# Altium PCB PCB.PcbDoc
Units mil, origin at the board's own origin, x right, y up, seen from the top; angles counter-clockwise.
Board outline 1578.8 x 1417.32 mil, 2 copper layers (Top Layer, Bottom Layer); 30 components, 50 nets, 209 pads, 57 vias.
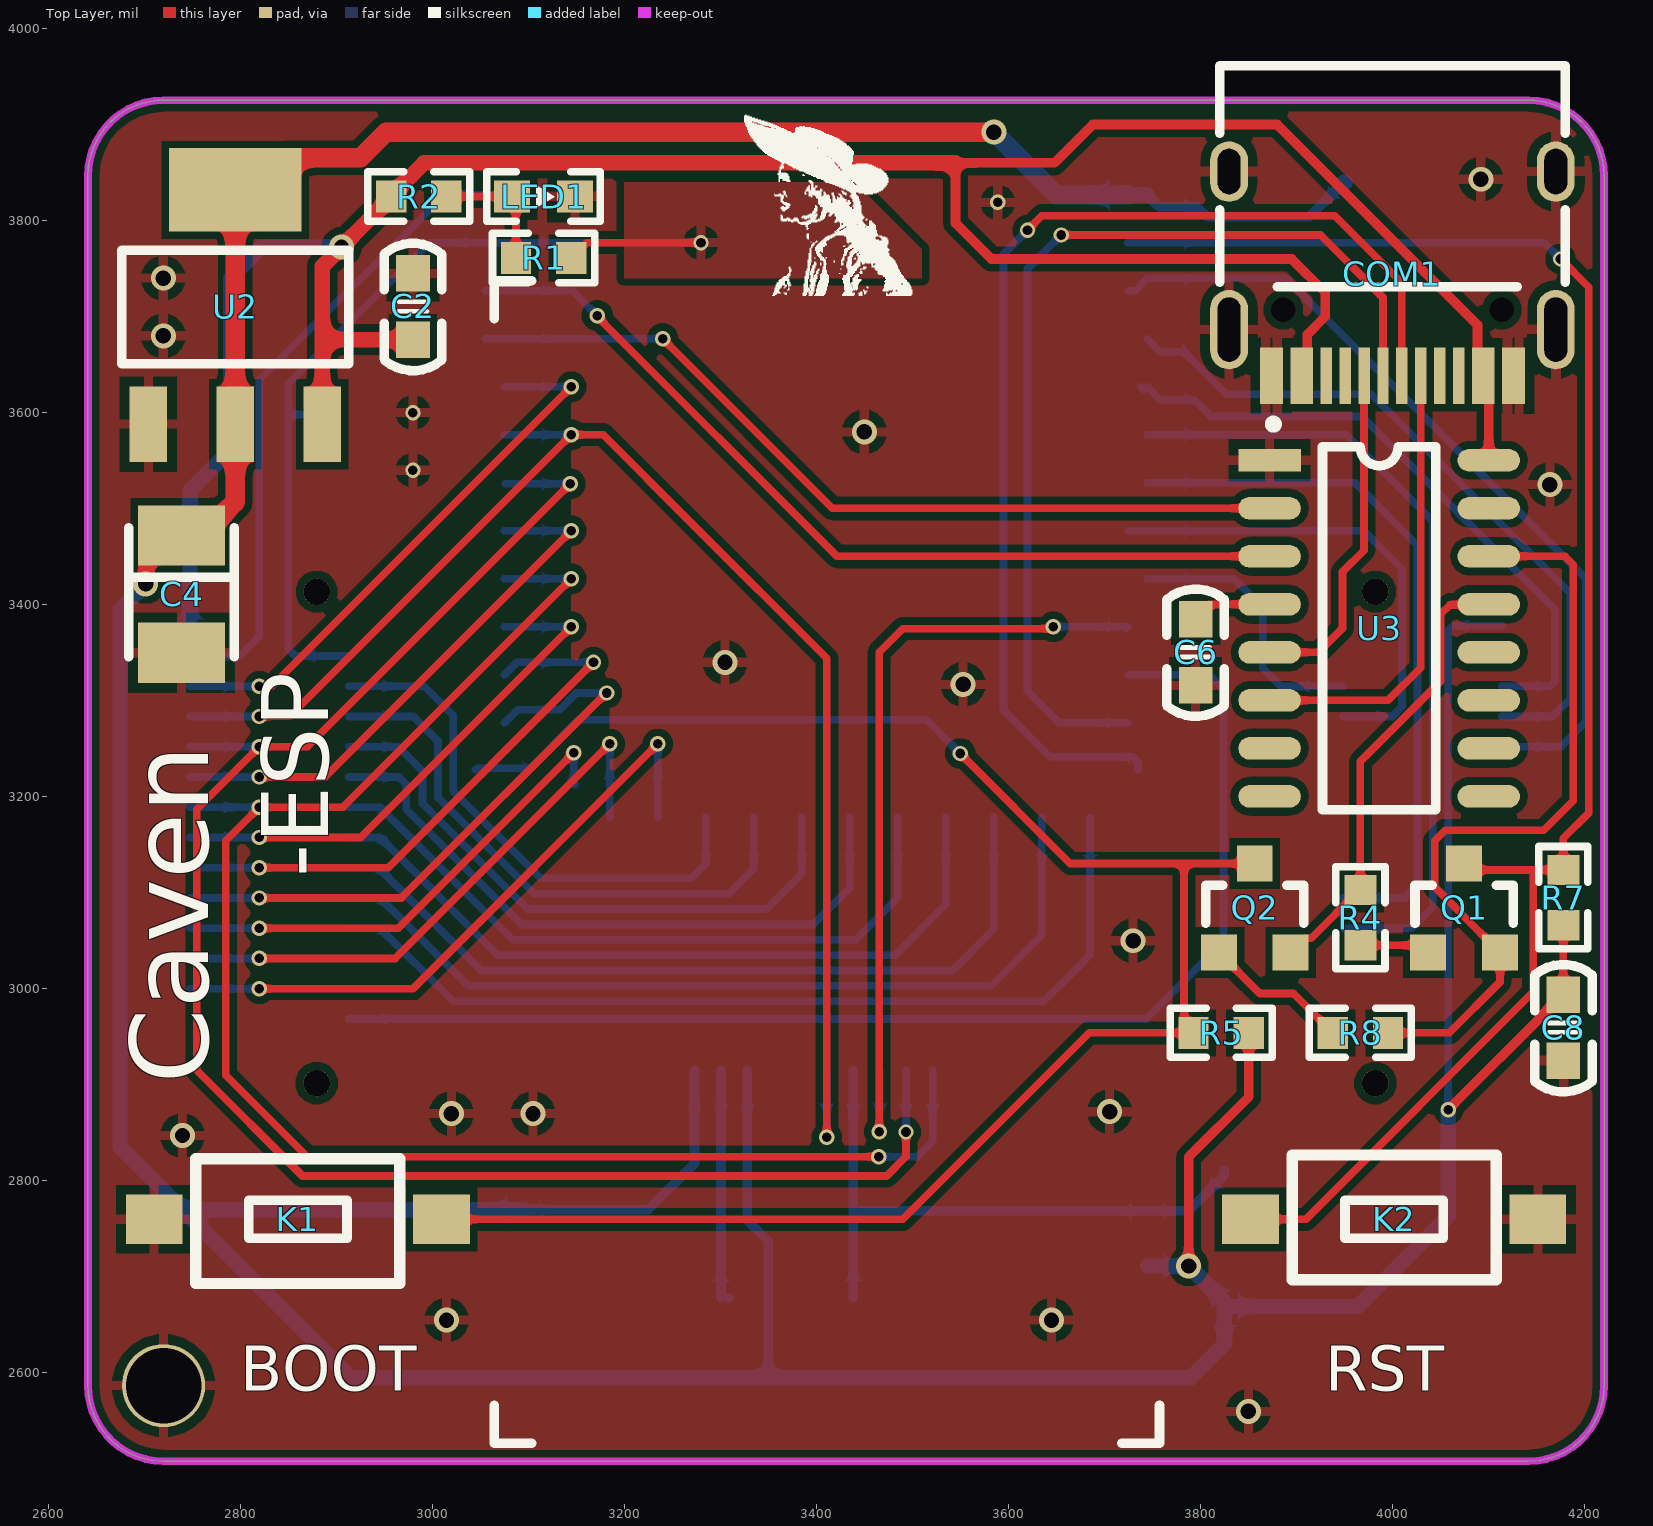
[diagram p0: Top Layer view]
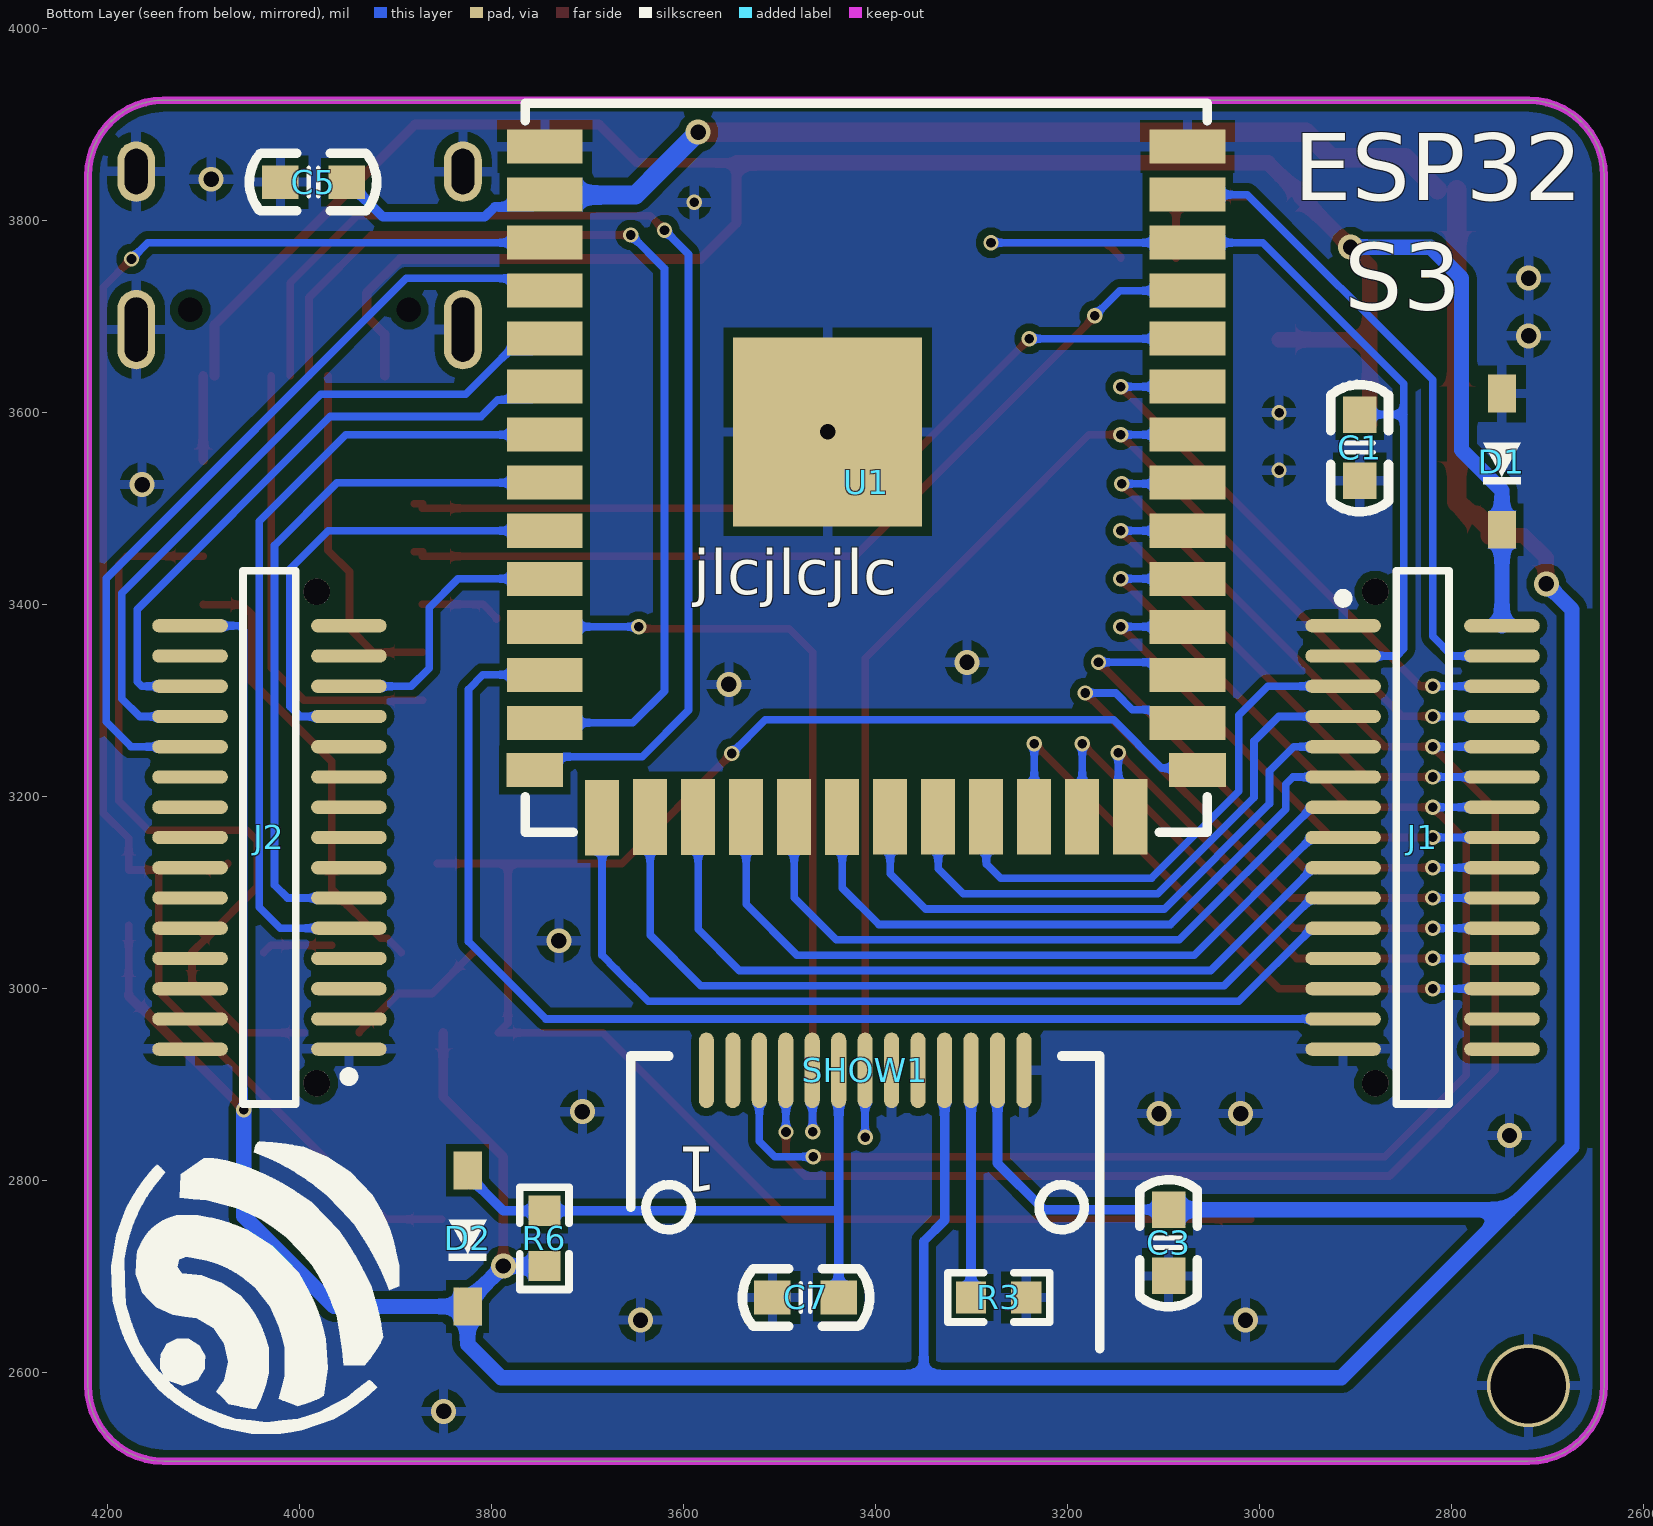
[diagram p1: Bottom Layer view, seen from below]
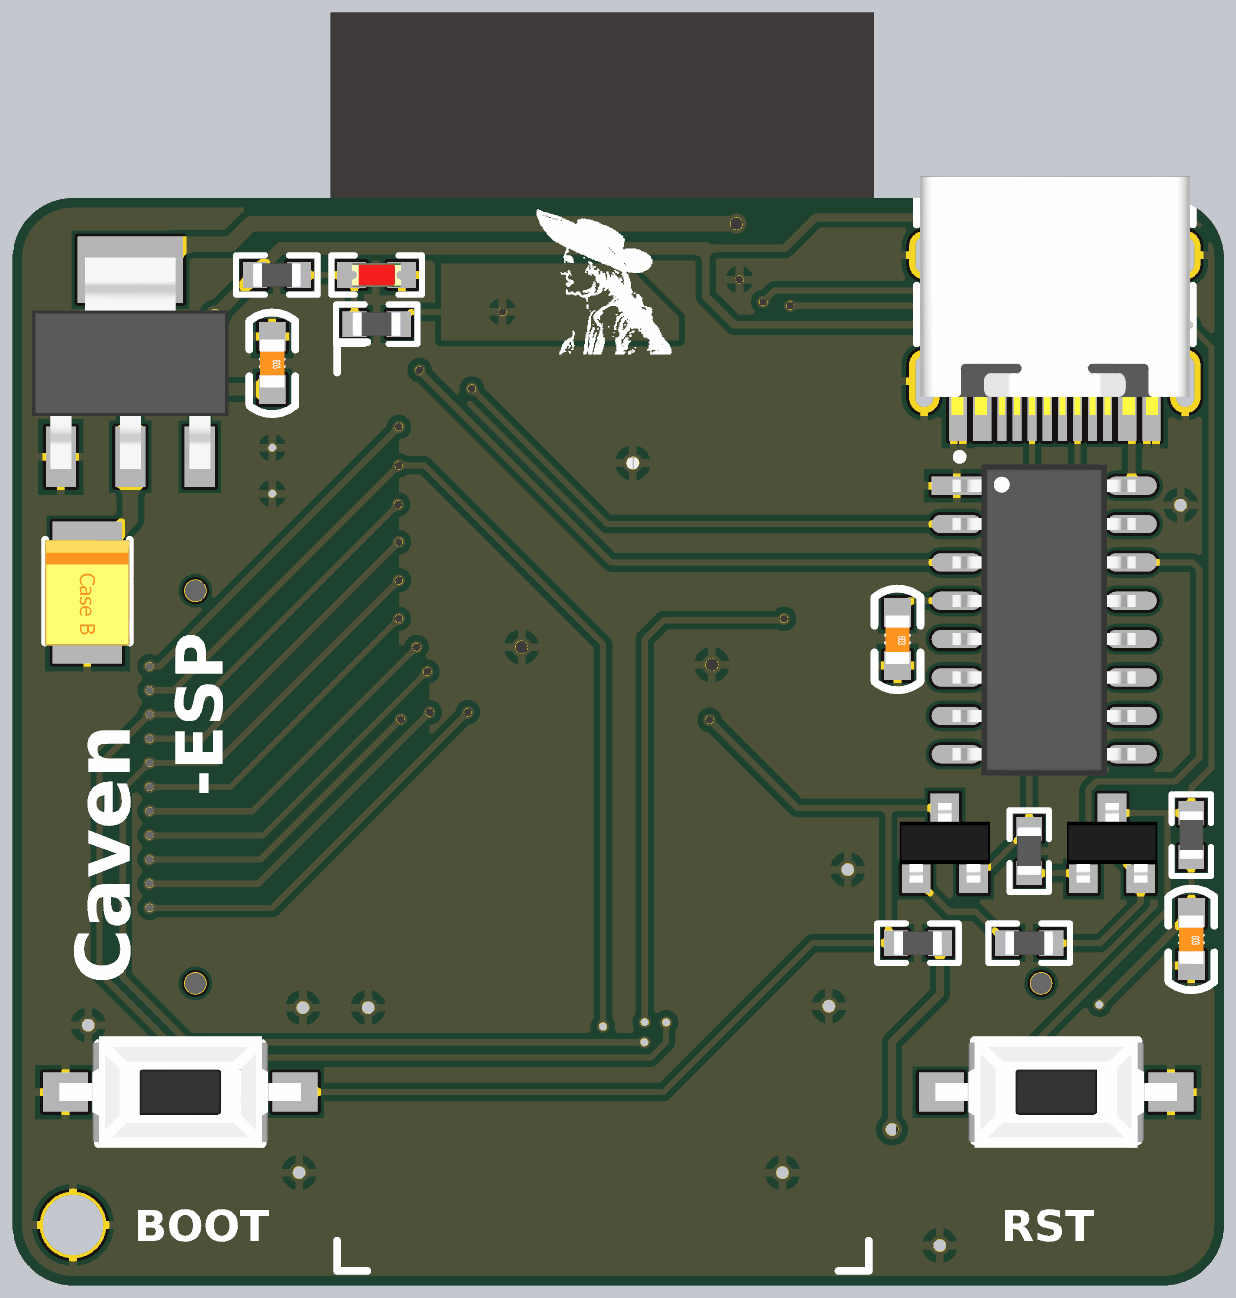
[diagram p2: 3D render of the assembled board from above, using the file's embedded part models]
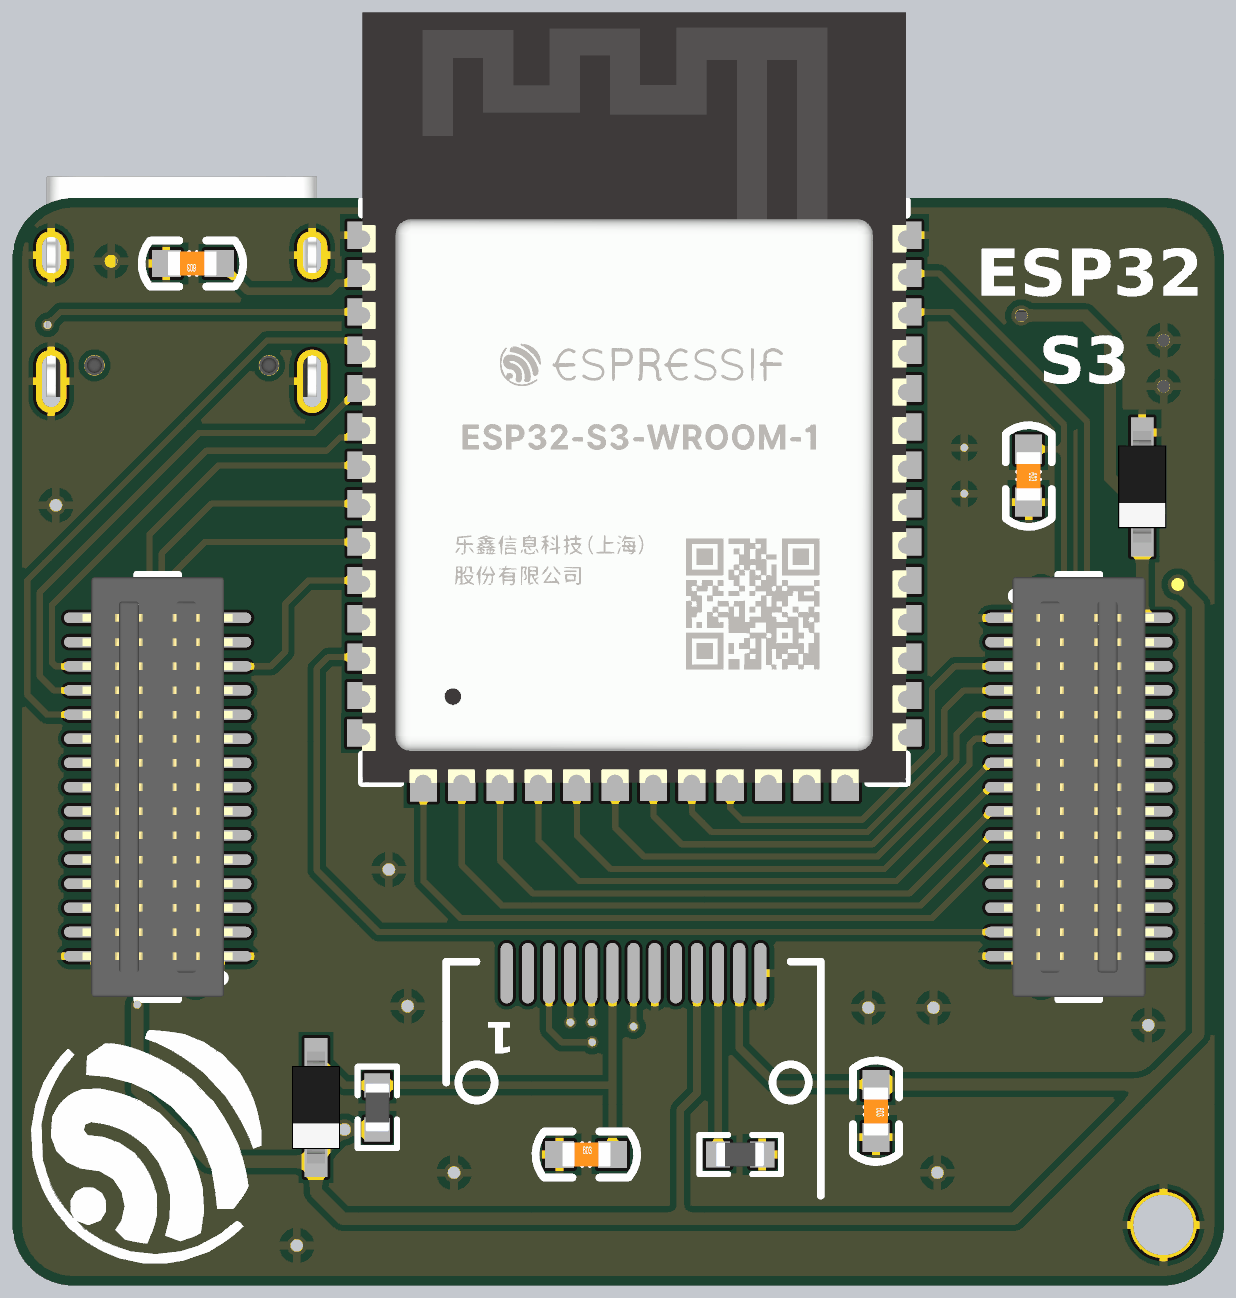
[diagram p3: 3D render of the assembled board from below, using the file's embedded part models]

## Layer stack, top to bottom
Top Solder: solder mask 0.4, Solder Resist, Dk 3.5
Top Layer: signal copper 1.4
Dielectric 1: dielectric 12.6, FR-4, Dk 4.8
Bottom Layer: signal copper 1.4
Bottom Solder: solder mask 0.4, Solder Resist, Dk 3.5

## Board outline
2641.56,2586.72 ccw(c2720.3,2586.72) 2720.3,2507.98 4141.62,2507.98 ccw(c4141.62,2586.72) 4220.36,2586.72 4220.36,3846.56 ccw(c4141.62,3846.56) 4141.62,3925.3 2720.3,3925.3 ccw(c2720.3,3846.56) 2641.56,3846.56

## Design rules (kind name [scope] priority, off if disabled: settings)
Clearance [All] p1: gap=8 ignorepadtopadclearanceinfootprint=TRUE
HoleSize [All] p1: absolutevalues=TRUE maxlimit=157.48 minlimit=0.98 maxpercent=80.000 minpercent=20.000
HoleToHoleClearance [All] p1: gap=8 allowstackedmicrovias=TRUE
MinimumSolderMaskSliver [All] p1: minsoldermaskwidth=2
PolygonConnect [All] p1: connectstyle=Relief reliefconductorwidth=10 reliefentries=4 polygonreliefangle="90 Angle" airgapwidth=10
RoutingVias [All] p1: holewidth=28 width=50 viastyle="Through Hole" minholewidth=10 minwidth=16 maxholewidth=28 maxwidth=50
SilkToSilkClearance [All] p1: silktosilkclearance=0
SilkToSolderMaskClearance [IsPad] p1: minsilkscreentomaskgap=0 clearancetoexposedcopper=TRUE
SolderMaskExpansion [All] p1: expansion=4 istentingtop=FALSE
Width [All] p1: maxlimit=30 minlimit=8 preferedwidth=8
25 further rules are at their usual default settings.

## Components (designator, comment, footprint, x,y, rotation, side; value= is the part's Value field where it differs from the comment)
C1 "22PF" CAP_0603 2896,3598 r270 bottom
C2 "100NF" CAP_0603 2980,3745 r270 top
C3 "100NF" CAP_0603 3095,2770 r270 bottom
C4 "100UF" CAP_3528_B 2739,3411 r90 top
C5 "100NF" CAP_0603 3951,3840 r0 bottom
C6 "100NF" CAP_0603 3795,3385 r270 top
C7 "4.7uF" CAP_0603 3507.56,2678.56 r180 bottom
C8 "100NF" CAP_0603 4178,2994 r270 top
COM1 "Type-C" USB-Type-C_16A 4000,3850 r180 top
D1 "Diode_SMA" DIODE_SOD123 2747.89,3619.79 r270 bottom
D2 "Diode" SOD123 3825,2740 r90 bottom
J1 "30PIN" BTB_Double_30Pin_Up 2842.38,3403.65 r180 bottom
J2 "30PIN" BTB_Double_30Pin_Up 4019.54,2911.52 r0 bottom
K1 "KEY" SW_PB_3X6 2860.09,2759.95 r180 top
K2 "KEY" SW_PB_3X6 4001.83,2759.95 r0 top
LED1 "LED_R/G/B/Y" LED_0603_R 3116.02,3825 r180 top
Q1 "NPN" SOT23_3 4074.64,3084.13 r270 top
Q2 "NPN" SOT23_3 3856.64,3084.13 r270 top
R1 "1M" RESC_0603_2 3116,3761 r180 top
R2 "10K" RESC_0603_2 2986.02,3825 r0 top
R3 "20R" RESC_0603_2 3272.02,2678.56 r0 bottom
R4 "10K" RESC_0603_2 3966.64,3074.13 r90 top
R5 "10K" RESC_0603_2 3821.64,2954.13 r0 top
R6 "4.7K" RESC_0603_2 3745,2740 r90 bottom
R7 "10K" RESC_0603_2 4178,3095 r270 top
R8 "10K" RESC_0603_2 3966.64,2954.13 r0 top
SHOW1 "ST7789" LCD_1.14 3245.65,2920 r0 top
U1 "ESP32-S3-WROOM-1" ESP32-S3-WROOM-1 3744.6,3876.97 r180 bottom
U2 "AMS1117_3.3" SOT223_3 2795,3710 r270 top
U3 "CH340C" SOIC_16 3986.21,3375.38 r270 top

## Footprints (in the part's own frame and the unit in brackets; to place one, negate y for a bottom-side part, rotate by r counter-clockwise, add the part's x,y. Pads: shape width x height; smd on the part's side, far side on the other; paste and mask are expansions set on the pad)
BTB_Double_30Pin_Up [mm] "0.8mm"
  round 0.7 hole 0.7: 0(-0.95,-12.75) 0(-0.95,0.25)
  oval 2x0.35 smd: 1(-1.8,-0.65) 2(-1.8,-1.45) 3(-1.8,-2.25) 4(-1.8,-3.05) 5(-1.8,-3.85) 6(-1.8,-4.65) 7(-1.8,-5.45) 8(-1.8,-6.25) 9(-1.8,-7.05) 10(-1.8,-7.85) 11(-1.8,-8.65) 12(-1.8,-9.45) 13(-1.8,-10.25) 14(-1.8,-11.05) 15(-1.8,-11.85) 16(2.4,-11.85) 17(2.4,-11.05) 18(2.4,-10.25) 19(2.4,-9.45) 20(2.4,-8.65) 21(2.4,-7.85) 22(2.4,-7.05) 23(2.4,-6.25) 24(2.4,-5.45) 25(2.4,-4.65) 26(2.4,-3.85) 27(2.4,-3.05) 28(2.4,-2.25) 29(2.4,-1.45) 30(2.4,-0.65)
  silkscreen extent -1.92,-13.3 1,0.8, body extent -2.18,-13.2 2.78,0.7, height 5.9
CAP_0603 [mil]
  rect 38x35 smd: 1(0,0) 2(69,0)
  silkscreen extent -31,-30 101,30, body extent 4,-16 67,16, height 12
CAP_3528_B [mm]
  rect 1.6x2.3 smd: 1(1.55,0) 2(-1.55,0)
  silkscreen extent -1.65,-1.4 1.75,1.4, body extent -1.75,-1.4 1.75,1.4, height 1.9
DIODE_SOD123 [mm]
  rect 1x0.75 smd: 1(0,0) 2(3.6,0)
  silkscreen extent 1.3,-0.5 2.4,0.5, body extent -0.05,-0.8 3.65,0.8, height 1.27
ESP32-S3-WROOM-1 [mm]
  rect 2x0.9 smd: 1(0,0) 2(0,-1.27) 3(0,-2.54) 4(0,-3.81) 5(0,-5.08) 6(0,-6.35) 7(0,-7.62) 8(0,-8.89) 9(0,-10.16) 10(0,-11.43) 11(0,-12.7) 12(0,-13.97) 13(0,-15.24) 28(17,-15.24) 29(17,-13.97) 30(17,-12.7) 31(17,-11.43) 32(17,-10.16) 33(17,-8.89) 34(17,-7.62) 35(17,-6.35) 36(17,-5.08) 37(17,-3.81) 38(17,-2.54) 39(17,-1.27) 40(17,0)
  rect 1.5x0.9 smd: 14(-0.263,-16.485) 27(17.263,-16.485)
  rect 0.9x2 smd: 15(1.515,-17.755) 16(2.785,-17.73) 17(4.055,-17.73) 18(5.325,-17.73) 19(6.595,-17.73) 20(7.865,-17.73) 21(9.135,-17.73) 22(10.405,-17.73) 23(11.675,-17.73) 24(12.945,-17.73) 25(14.215,-17.73) 26(15.485,-17.73)
  rect 5x5 smd: 41(7.483,-7.543)
  silkscreen extent -0.52,-18.14 17.52,1.14, body extent -0.52,-18.14 17.5,7.37, height 3.11
LCD_1.14 [mm] "ST7789"
  oval 0.4x2 smd far side: 1(8.4,-0.127) 2(7.7,-0.127) 3(7,-0.127) 4(6.3,-0.127) 5(5.6,-0.127) 6(4.9,-0.127) 7(4.2,-0.127) 8(3.5,-0.127) 9(2.8,-0.127) 10(2.1,-0.127) 11(1.4,-0.127) 12(0.7,-0.127) 13(0,-0.127)
  silkscreen extent -4.6,-9.98 13,20.76, body extent -4.6,-9.91 13,20.57, height 0.9
LED_0603_R [mm]
  rect 0.95x0.85 smd: 1(-0.83,0) 2(0.83,0)
  silkscreen extent -1.5,-0.65 1.5,0.65, body extent -0.81,-0.4 0.81,0.4, height 0.6
RESC_0603_2 [mm]
  rect 0.8x0.85 smd: 1(-0.73,0) 2(0.73,0)
  silkscreen extent -1.35,-0.65 1.35,0.65, body extent -0.8,-0.4 0.8,0.4, height 0.38
SOD123 [mm]
  rect 1x0.75 smd: 1(-1.8,0) 2(1.8,0)
  silkscreen extent -0.6,-0.5 0.5,0.5, body extent -1.85,-0.8 1.85,0.8, height 1.27
SOIC_16 [mm]
  rect 0.6x1.65 smd: 1(-4.445,-2.9)
  oval 0.6x1.65 smd: 2(-3.175,-2.9) 3(-1.905,-2.9) 4(-0.635,-2.9) 5(0.635,-2.9) 6(1.905,-2.9) 7(3.175,-2.9) 8(4.445,-2.9) 9(4.445,2.9) 10(3.175,2.9) 11(1.905,2.9) 12(0.635,2.9) 13(-0.635,2.9) 14(-1.905,2.9) 15(-3.175,2.9) 16(-4.445,2.9)
  silkscreen extent -5.5,-2.9 4.8,1.5, body extent -5.15,-3.03 5.15,3.03, height 1.95
SOT23_3 [mm]
  rect 0.95x0.95 smd: 1(1.175,-0.95) 2(1.175,0.95) 3(-1.175,0)
  silkscreen extent -0.6,-1.3 0.4,1.3, body extent -1.34,-1.5 1.3,1.5, height 1.08
SOT223_3 [mm]
  rect 2x1 smd: 1(3.1,-2.3) 2(3.1,0) 3(3.1,2.3)
  rect 2.2x3.5 smd: 4(-3.1,0)
  silkscreen extent -1.5,-3 1.5,3, body extent -3.5,-3.25 3.5,3.25, height 1.64
SW_PB_3X6 [mm]
  rect 1.5x1.3 smd: 1(-3.8,0) 2(3.8,0)
  silkscreen extent -2.7,-1.6 2.7,1.7, body extent -4,-1.85 4,1.85, height 2.6
USB-Type-C_16A [mm]
  round 0 hole 0.65: 0(-2.89,3.625) 0(2.89,3.625)
  oval 1x2.1 hole 0.6 slot 1.7 at 90 deg: A(-4.32,4.155) B(4.32,4.155)
  rect 0.3x1.5 smd: A1(-3.35,5.375) A4(-2.55,5.375) A5(-1.25,5.375) A6(-0.25,5.375) A7(0.25,5.375) A8(-1.75,5.375) A9(2.55,5.375) A12(3.35,5.375) B1(3.05,5.375) B4(2.25,5.375) B5(1.75,5.375) B6(0.75,5.375) B7(-0.75,5.375) B8(1.25,5.375) B9(-2.25,5.375) B12(-3.05,5.375)
  oval 1x1.6 hole 0.6 slot 1.2 at 90 deg: C(-4.32,-0.025) D(4.32,-0.025)
  silkscreen extent -4.57,-2.82 4.57,3.02, body extent -4.47,-2.63 4.47,5.27, height 3.25

## Part data
C1 C2 C3 C5 C6 C8: library part CAP, "CAP  12~50V"
C4: library part CAP_TA, "CAP  6~12V  钽电容"
C7: library part CAP_SDM, "CAP"
COM1: library part USB-type_c, "USB"
D1: library part Diode-SM, "Diode_肖特基"
D2: library part Diode-SOD, "开关二极管"
J1 J2: library part BTB_DOUBLE_30PIN
K1 K2: "Key"
LED1: library part LED, "LED"
R1 R2 R3 R4 R5 R6 R7 R8: library part RES_S, "RES 贴片"
SHOW1: library part LCD_1.14, "SHOW"
U1: BOM_JLCPCB Part Class="Extended Part", BOM_Manufacturer="Espressif Systems", BOM_Manufacturer Part=ESP32-SOLO-1, BOM_Supplier=LCSC, BOM_Supplier Part=C473005, Contributor=LCSC, spicePre=U, spiceSymbolName=ESP32-S3-WROOM-1
U2: "DC-DC"
U3: BOM_Manufacturer=WCH, BOM_Manufacturer Part=CH340C, BOM_Paste Type=recommend, BOM_Supplier=LCSC, BOM_Supplier Part=C84681, spicePre=U, spiceSymbolName=CH340C

## Free pads (board coordinates)
  round 86.61 hole 78.74: 0(2720.3,2586.72)

## Via types
v1: diameter 16, hole 10, Top Layer to Bottom Layer, tented both sides, 38 vias
v2: diameter 26, hole 16, Top Layer to Bottom Layer, tented both sides, 19 vias

## Nets (pads, with @x,y where several pads share a name; then routed paths per layer and width w, separated by ;. In a path a pad name is that pad's centre, name@x,y a point inside that pad or via, vN(x,y) a via of type N, cw(c..) or ccw(c..) an arc to the next point about the centre after c; other vN are vias at no path point)
ADC1: J2.13 U1.10 | length 287.3
  Bottom Layer w8: U1.10 3834.97,3426.97 3865,3396.94 3865,3334 3883.93,3315.07 J2.13
ADC2: J2.12 U1.9 | length 510.6
  Bottom Layer w8: U1.9@3724.6,3476.97 U1.9 3970.03,3476.97 4010,3437 4010,3294 3999.57,3283.57 J2.12
BOOT: K1.1 Q2.3 R5.1 U1.27 | length 1939.4
  Top Layer w8: K1.1 3489.95,2759.95 3684.13,2954.13 R5.1 3783,2964.03 3783,3130.39 ; v1(3550,3245) 3664.61,3130.39 3783,3130.39 ; Q2.3 3783,3130.39
  Bottom Layer w8: U1.27@3044.96,3227.95 3046.81,3229.8 3102.21,3229.8 3126.69,3254.28 3126.69,3254.69 3152,3280 3515,3280 v1(3550,3245)
D/C: SHOW1.5 U1.11 | length 833.4
  Top Layer w8: v1(3465.48,2851.2) 3465.48,3350.48 3490,3375 v1@3645,3375
  Bottom Layer w8: v1(3465.48,2851.2) 3465.8,2851.52 3465.8,2914.68 SHOW1.5 ; v1(3646.97,3376.97) 3724.6,3376.97 U1.11@3722.63,3375
DN: COM1.B7 U3.6 | length 475.5
  Top Layer w8: U3.6 3995.38,3300.38 4029.52,3334.52 COM1.B7
DP: COM1.B6 U3.5 | length 358.7
  Top Layer w8: U3.5 3923.08,3350.38 3948,3375.3 3948,3434.3 3970.47,3456.77 COM1.B6
DTR: Q2.2 R4.2 U3.13 | length 475.9
  Top Layer w8: Q2.2 3908.74,3052.57 3915.36,3052.57 3965.66,3102.87 R4.2 3966.64,3236.64 4049.95,3319.95 4049.95,3389.95 4060,3400 4100,3400 U3.13
EN: K2.1 Q1.3 R7.1 U1.3 | length 1742.9
  Top Layer w8: K2.1 3909.95,2759.95 4146.75,2996.75 4146.75,3122.74 4147.75,3123.74 ; Q1.3 4081.29,3123.74 4147.75,3123.74 ; v1(4175,3760) 4204.36,3730.64 4204.36,3183.06 4178,3156.7 R7.1 4147.75,3123.74
  Bottom Layer w8: U1.3@3724.6,3776.97 4158.03,3776.97 v1(4175,3760)
GND: C1.2 C2.1 C3.2 C4.2 C5.2 C6.2 C7.1 C8.2 COM1.A COM1.A1 COM1.A12 COM1.B COM1.B1 COM1.B12 COM1.C COM1.D D1.1 J1.1 J1.15 J2.1 J2.30 K1.2 K2.2 LED1.1 pad.0 R3.1 SHOW1.8 SHOW1.13 U1.1 U1.40 U1.41 U2.1 U3.1
  other v1: 2980,3540 2980,3600 3589,3819
  other v2: 3850,2560 3015,2655 3645,2655 2740,2847.18 3020,2870 3105,2870 3705.5,2871.97 3730,3050 3553,3317 3305,3340 4164,3525 3450,3580 2720,3680 2720,3740 4092,3843
IO1: J1.29 U1.39 | length 682.8
  Bottom Layer w8: J1.29 2799.56,3346.56 2820,3367 2820,3634 3012.97,3826.97 U1.39
IO2: C1.1 J1.2 R1.1 U1.38 | length 1021.7
  Top Layer w8: R1.1 3144.74,3761.98 3156.49,3773.73 3157.94,3773.73 3161.17,3776.97 v1(3280,3776.97)
  Bottom Layer w8: C1.1 2850,3598 ; J1.2 2857.44,3346.56 2850,3354 2850,3598 ; v1(3280,3776.97) U1.38 2996.97,3776.97 2850,3630 2850,3598
IO3: J1.11 U1.15 | length 966.1
  Bottom Layer w8: J1.11 2945.72,3063.1 3021.82,2987 3637,2987 3670,3020 3684.96,3034.96 U1.15
IO4: J2.20 U1.4 | length 858.8
  Bottom Layer w8: U1.4@3724.6,3726.97 3731.97,3726.97 3744.77,3739.77 3888.82,3739.77 4201.36,3427.22 4201.36,3278 4175.44,3252.08 J2.20
IO5: J2.19 U1.5 | length 738.8
  Bottom Layer w8: U1.5 3758.32,3663.25 3782.75,3663.25 3827,3619 3978,3619 4185,3412 4185,3302 4166.57,3283.57 J2.19
IO6: J2.18 U1.6 | length 657.3
  Bottom Layer w8: U1.6@3738.03,3626.97 U1.6@3741.32,3623.68 ; U1.6 3758.32,3613.25 3793.75,3613.25 3811,3596 3968,3596 4169,3395 4169,3319.75 4164.31,3315.07 J2.18
IO7: J2.5 U1.7 | length 839.1
  Bottom Layer w8: U1.7 3952.03,3576.97 4042,3487 4042,3085 4020.1,3063.1 J2.5
IO8: J1.14 U1.12 | length 1312.7
  Bottom Layer w8: J1.14 3743.61,2968.61 3824,3049 3824,3312 3809.03,3326.97 U1.12@3724.6,3326.97
IO9: J1.9 U1.17 | length 850.8
  Bottom Layer w8: J1.9 2944.16,3126.09 3051.25,3019 3542,3019 3584.96,3061.96 U1.17
IO10: J1.8 U1.18 | length 785.4
  Bottom Layer w8: J1.8 2945.72,3157.59 3068.31,3035 3482,3035 3534.96,3087.96 U1.18
IO11: J1.7 U1.19 | length 731.1
  Bottom Layer w8: J1.7 2945.72,3189.08 3083.81,3051 3441,3051 3484.96,3094.96 U1.19
IO12: J1.6 U1.20 | length 690.3
  Bottom Layer w8: J1.6 2965.42,3220.58 2973,3213 2973,3187 3093,3067 3397,3067 3434.96,3104.96 U1.20
IO13: J1.5 U1.21 | length 636
  Bottom Layer w8: J1.5 2964.61,3252.08 2990,3226.69 2990,3192.63 3099.63,3083 3348,3083 3384.96,3119.96 U1.21
IO14: J1.4 U1.22 | length 597.3
  Bottom Layer w8: J1.4 2980.43,3283.57 3006,3258 3006,3199.25 3106.25,3099 3309,3099 3334.96,3124.96 U1.22
IO15: J2.6 U1.8 | length 745.2
  Bottom Layer w8: U1.8 3961.03,3526.97 4026,3462 4026,3108 4012.6,3094.6 J2.6
IO19: COM1.A7 U1.13 | length 1051.4
  Top Layer w8: v1(3655,3785) 3925,3785 3990.15,3719.85 COM1.A7
  Bottom Layer w8: v1(3655,3785) 3620,3750 3620,3310 3653.03,3276.97 U1.13@3724.6,3276.97
IO20: COM1.A6 U1.14 | length 1202.6
  Top Layer w8: v1(3620,3790) 3635,3805 3940,3805 4009.84,3735.16 COM1.A6
  Bottom Layer w8: v1(3620,3790) 3595,3765 3595,3290 3643.33,3241.67 3729.44,3241.67 3734.96,3236.14 U1.14@3734.96,3227.95
IO21: J1.3 U1.23 | length 556.1
  Bottom Layer w8: J1.3 2991.93,3315.07 3022,3285 3022,3205.88 3112.88,3115 3269.96,3115 3284.96,3130 U1.23
IO35: J1.21 U1.28 | length 642
  Top Layer w8: v1(2820,3094.6) 2967.99,3094.6 3181.39,3308 v1(3182,3308)
  Bottom Layer w8: J1.21 v1(2820,3094.6) ; U1.28 3089.04,3290.69 3132.69,3290.69 3150,3308 v1(3182,3308)
IO36: J1.22 U1.29 | length 606.8
  Top Layer w8: v1(2820,3126.09) 2954.09,3126.09 v1(3167.99,3339.99)
  Bottom Layer w8: J1.22 v1(2820,3126.09) ; U1.29 3088.34,3339.99 v1(3167.99,3339.99)
IO37: J1.23 U1.30 | length 557.7
  Top Layer w8: v1(2820,3157.59) 2925.62,3157.59 v1(3145,3376.97)
  Bottom Layer w8: J1.23 v1(2820,3157.59) ; U1.30 v1(3145,3376.97)
IO38: J1.24 SHOW1.3 U1.31 | length 1710.8
  Top Layer w8: v1(3145,3426.97) 2907.11,3189.08 v1(2820,3189.08) 2785,3154.08 2785,2910 2870,2825 v1(3465,2825)
  Bottom Layer w8: J1.24 v1(2820,3189.08) ; U1.31 v1(3145,3426.97) ; v1(3465,2825) 3505,2825 3521.14,2841.14 3521.14,2851.38 3521.19,2851.43 SHOW1.3 SHOW1.3
IO39: J1.25 U1.32 | length 573
  Top Layer w8: v1(2820,3220.58) 2888.61,3220.58 v1(3145,3476.97)
  Bottom Layer w8: J1.25 v1(2820,3220.58) ; U1.32 v1(3145,3476.97)
IO40: J1.26 SHOW1.4 U1.33 | length 1825.4
  Top Layer w8: v1(3143.88,3525.85) 2870.11,3252.08 v1(2820,3252.08) 2755,3187.08 2755,2915 2865,2805 3473.39,2805 3493.4,2825.01 v1(3493.4,2850.84) v1@3491.87,2849.31
  Bottom Layer w8: J1.26 v1(2820,3252.08) ; U1.33@3076.44,3525.85 v1(3143.88,3525.85) ; v1(3493.4,2850.84) 3493.54,2850.98 3493.54,2914.86 SHOW1.4
IO41: J1.27 SHOW1.7 U1.34 | length 1513.9
  Top Layer w8: v1@2820.17,3283.74 2851.77,3283.74 v1(3145,3576.97) 3178.03,3576.97 3270,3485 3411,3344 v1(3411,2845.36)
  Bottom Layer w8: J1.27 v1(2820,3283.57) ; U1.34 v1(3145,3576.97) ; v1@3411.18,2845.54 SHOW1.7@3411.18,2910.18
IO42: J1.28 U1.35 | length 596
  Top Layer w8: v1(2820,3315.07) 2833.1,3315.07 v1(3145,3626.97)
  Bottom Layer w8: J1.28 v1(2820,3315.07) ; U1.35 v1(3145,3626.97)
IO45: J1.20 U1.26 | length 508.6
  Top Layer w8: v1(2820,3063.1) 2964.78,3063.1 v1(3147.34,3245.66)
  Bottom Layer w8: J1.20 v1(2820,3063.1) ; v1(3147.34,3245.66) 3147.34,3214 U1.26@3148.68,3212.66
IO46: J1.10 U1.16 | length 904.6
  Bottom Layer w8: J1.10 2945.72,3094.6 3037.32,3003 3582,3003 3634.96,3055.96 U1.16
IO47: J1.18 U1.24 | length 668.7
  Top Layer w8: v1(2820,3000.11) 2980.07,3000.11 v1(3234.96,3255)
  Bottom Layer w8: J1.18 v1(2820,3000.11) ; U1.24 v1(3234.96,3255)
IO48: J1.19 U1.25 | length 605.7
  Top Layer w8: v1(2820,3031.6) 2961.56,3031.6 v1(3184.96,3255)
  Bottom Layer w8: J1.19 v1(2820,3031.6) ; U1.25 v1(3184.96,3255)
NetC6_1: C6.1 U3.4 | length 84.3
  Top Layer w8: C6.1 3795,3386.5 3808.88,3400.38 U3.4
NetQ1_1: Q1.1 R4.1 | length 73.7
  Top Layer w8: R4.1 4029.72,3045.39 Q1.1
NetQ2_1: Q2.1 R8.1 | length 153.9
  Top Layer w8: Q2.1 3862.11,2995 3897.03,2995 3925.17,2966.86 3926.15,2966.86 3937.9,2955.11 R8.1
NetR3_2: R3.2 SHOW1.11 | length 236.5
  Bottom Layer w10: R3.2 SHOW1.11
RES: C7.2 D2.2 R6.2 SHOW1.6 | length 643.7
  Bottom Layer w10: C7.2 3438.56,2770 ; SHOW1.6 3438.56,2770 ; D2.2 3825,2805.94 3787.8,2768.74 R6.2 3439.82,2768.74 3438.56,2770
RTS: Q1.2 R8.2 U3.14 | length 812.8
  Top Layer w8: R8.2 4059.13,2954.13 4112.04,3007.04 Q1.2 Q1.2@4097.34,3052.57 ; Q1.2@4097.34,3052.58 4043.94,3105.98 4043.94,3154.06 4054.88,3165 4157.37,3165 4188.36,3195.99 4188.36,3441.64 4179.62,3450.38 U3.14
RXD0: U1.36 U3.2 | length 898.4
  Top Layer w8: v1(3240,3676.97) 3416.59,3500.38 U3.2 ; U3.2@3872.04,3505 U3.2@3880.53,3505
  Bottom Layer w8: U1.36@3055.32,3676.97 v1(3240,3676.97)
TXD0: U1.37 U3.3 | length 940.4
  Top Layer w8: v1(3172,3701) 3172,3700 3421.62,3450.38 U3.3 ; U3.3@3872.04,3455 U3.3@3880.53,3455
  Bottom Layer w8: U1.37@3055.32,3726.97 3146.03,3726.97 v1(3172,3701)
VA: LED1.2 R1.2 R2.2 | length 134.2
  Top Layer w8: R2.2 LED1.2 3087.26,3821.09 R1.2
VBUS: C2.2 COM1.A4 COM1.A9 COM1.B4 COM1.B9 D1.2 J1.30 R2.1 U2.3 U3.16 | length 2831.9
  Top Layer w10: COM1.B4 3911.41,3681.41 3930,3700 3930,3725 3895,3760 3582.26,3760 3545,3797.26 3545,3860 3648,3860 3688,3900 3880,3900 4088.57,3691.43 COM1.B9 ; U3.16 COM1.A4
  Top Layer w16: U2.3 2885.55,3676 ; C2.2 2885.55,3676 ; 3545,3860 2991.3,3860 2957.28,3825.98 R2.1 2957.28,3824.02 v2(2905.55,3772.28) 2885.55,3752.28 2885.55,3676
  Bottom Layer w16: J1.30 D1.2 2747.89,3518.89 2790,3561 2790,3740 2822.28,3772.28 v2(2905.55,3772.28)
VDD: C3.1 C4.1 C5.1 C8.1 D2.1 J2.16 R5.2 R6.1 R7.2 SHOW1.10 SHOW1.12 U1.2 U2.2 U2.4 | length 6111
  Top Layer w8: C8.1 R7.2
  Top Layer w10: v2(3787.8,2711.26) 3787.8,2824.8 3850.38,2887.38 R5.2 ; v1(4058,2874) 4164,2980 4165.5,2980 4178,2992.5 C8.1
  Top Layer w16: v2(2701.72,3421.72) 2701.72,3448.53 2725.22,3472.02 C4.1 ; C4.1@2746.22,3472 C4.1@2760,3472
  Top Layer w20: C4.1@2760,3472 2760,3479.24 2774.28,3493.52 2781.52,3493.52 2795,3507 U2.4 ; U2.4@2815,3832.05 2848.31,3865.35 2925.35,3865.35 2952,3892 v2(3585,3892)
  Bottom Layer w8: v1(4058,2874) 4058,3373.37 4062.69,3378.06 J2.16
  Bottom Layer w10: C3.1 3225,2770 3273.2,2818.2 SHOW1.12 ; SHOW1.10 3328.32,2758.76 3350,2737.09 3350,2595 ; U1.2 3757.32,3814.25 3796.75,3814.25 3807,3804 3913.5,3804 C5.1@3949.5,3840
  Bottom Layer w16: v2(2701.72,3421.72) 2675,3395 2675,2835 2740,2770 ; C3.1 2740,2770 ; U1.2@3724.6,3826.97 U1.2 ; R6.1 v2(3787.8,2711.26) 3825,2674.06 D2.1 ; C5.1@3949.5,3840 C5.1 ; v1(4058,2874) 4058,2763 3964.13,2669.13 D2.1 ; 2740,2770 2915,2595 3350,2595 3790,2595 3825,2630 D2.1
  Bottom Layer w20: v2(3585,3892) 3618.98,3858.02 3650.52,3826.48 3724.12,3826.48 U1.2@3724.6,3826.97
pads on no net: COM1.0 COM1.A5 COM1.A8 COM1.B5 COM1.B8 J1.0 J1.12 J1.13 J1.16 J1.17 J2.0 J2.2 J2.3 J2.4 J2.7 J2.8 J2.9 J2.10 J2.11 J2.14 J2.15 J2.17 J2.21 J2.22 J2.23 J2.24 J2.25 J2.26 J2.27 J2.28 J2.29 SHOW1.1 SHOW1.2 SHOW1.9 U3.7 U3.8 U3.9 U3.10 U3.11 U3.12 U3.15

## Polygon pours and split planes (outlines as drawn)
GND on Top Layer "GND_L01_P004" (solid, remove dead copper, pour order 4): 2100,4300 4700,4300 4700,2200 2100,2200
IO2 on Top Layer "IO2_L01_P003" (solid, remove dead copper, pour order 3): 3200,3840 3200,3740 3510,3740 3510,3770 3450,3830 3450,3840
GND on Bottom Layer "GND_L02_P005" (solid, remove dead copper, pour order 5): 2450,4350 4800,4350 4800,2200 2450,2200

## Keep-outs
Keep-Out Layer:
  lines w8: 2641.56,2586.72 ccw(c2720.3,2586.72) 2720.3,2507.98 4141.62,2507.98 ccw(c4141.62,2586.72) 4220.36,2586.72 4220.36,3846.56 ccw(c4141.62,3846.56) 4141.62,3925.3 3097.3,3925.3 2744.3,3925.3 2720.3,3925.3 ccw(c2720.3,3846.56) 2641.56,3846.56 2641.56,2586.72

## Other copper
Top Layer:
  pour cut-out: 3145,3626.97 3145,3320 3140,3315 3005,3315 3005,3490
  pour cut-out: 2820,3315.07 3184.96,3314.99 3184.96,3204.96 2980.11,3000.11 2820,3000.11

## Silkscreen, mask and mechanical layers (free items; w line width, h text height)
Top Overlay:
  drawing of 789 lines, arcs and shapes, not listed
  text "-ESP" at 2914.89,3116 h120 r90
  text "Caven" at 2794.04,2901 h140 r90
  text "BOOT" at 2800,2565.74 h80
  text "RST" at 3930,2565.74 h80
Bottom Overlay:
  drawing of 4 lines, arcs and shapes, not listed
  text "ESP32" at 2964.89,3798.11 h120
  text "S3" at 2912,3684.11 h120
  text "jlcjlcjlc" at 3590,3395.14 h80

## Text inside footprints (layer, text, board x,y; h text height)
SHOW1: Bottom Overlay "1" at 3565.65,2851.26 h80 r180